# EAGLE board Prática 1 (EAGLE 9.7.0)

Size 46.08 x 65.86 mm. Coordinates in mm from the lower left corner, seen from the top.
Outline: 0,0 46.09,0 46.09,65.86 0,65.86 0,0
Copper layers (1*16): Top 0.035mm / dielectric 1.5mm / Bottom 0.035mm
Design rules "default": minimum track width 6mil, minimum drill 0.35mm, track to track 6mil, track to pad 6mil, pad to pad 6mil, via to via 6mil, smd to smd 6mil, copper to edge 40mil, drill to drill 6mil, minimum pad ring 10mil, minimum via ring 8mil, stop-mask expansion 4mil, vias tented up to drill 0mil, thermal gap 10mil

## Footprints (pad centres in the part's own frame; a part is rotated, then mirrored left to right if it is on the bottom)
CAPPRD254W65D500H1150B = drill 0.85 pad 1.45: 1 -1.27,0; 2 1.27,0
LEDRD254W60D565H860B_B = drill 0.981 pad 1.581: 1 -1.27,0; 2 1.27,0
BATTERY-GENERIC = drill 1.118 pad 3.15 octagon: + 2.54,0; - -2.54,0
RESAD1016W63L850D250B = drill 0.83 pad 1.43: 1 -5.08,0; 2 5.08,0
DIP826W53P254L959H508Q8B = drill 0.786 pad 1.386: 1 -4.13,3.81; 2 -4.13,1.27; 3 -4.13,-1.27; 4 -4.13,-3.81; 5 4.13,-3.81; 6 4.13,-1.27; 7 4.13,1.27; 8 4.13,3.81

## Placement (x,y rotation side)
C2  47u  [CAPPRD254W65D500H1150B]  40.35,10.59 0 top
D1  BLUE  [LEDRD254W60D565H860B_B]  6.06,8.05 180 top
P1  BATTERYGENERIC  [BATTERY-GENERIC]  27.73,57.61 180 top
R1  10k  [RESAD1016W63L850D250B]  22.57,30.91 0 top
R2  220k  [RESAD1016W63L850D250B]  17.49,10.59 0 top
R3  10k  [RESAD1016W63L850D250B]  32.73,33.45 0 top
U1  LM555_DIP  [DIP826W53P254L959H508Q8B]  21.3,19.48 90 top

## Library data of the parts
C2 P1 R1-R3 = Tinkercad
D1 = Tinkercad; CATEGORY: Opto-Electronic; SUB-CATEGORY: LED; VALUE: LED_BLUE
U1 = Tinkercad; CATEGORY: IC_Clock-Timing; CURRENT-SUPPLY: 10mA; DESCRIPTION: IC OSC SINGLE TIMER 100KHZ 8-DIP; FREQUENCY: 100kHz; MANUFACTURER: Texas Instruments; MPN: LM555CN/NOPB; OPERATING_TEMP: 0°C to 70°C; PART_STATUS: Active; ROHS_COMPLIANT: ROHS3 Compliant; SUB-CATEGORY: Timer

## Nets
D1_A: D1.1 R2.1
P1+: P1.+ R1.1 U1.8
P1-: C2.2 D1.2 P1.- U1.1 U1.4
U1_DIS: R1.2 R3.1 U1.7
U1_OUT: R2.2 U1.3
U1_THR: C2.1 R3.2 U1.2 U1.6

## Tracks (layer width: path | path; a pad name or v marks a point on that pad's centre or on a via)
D1_A  (1 unrouted)
P1+  (2 unrouted)
P1-  (4 unrouted)
U1_DIS  (2 unrouted)
U1_OUT  (1 unrouted)
U1_THR  (3 unrouted)